# Altium PCB RT_SUPER_C.PCBdoc.ascii.PCBdoc (part 1 of 2)
Units mil, origin at the board's own origin, x right, y up, seen from the top; angles counter-clockwise.
Board outline 1450 x 1450 mil, 4 copper layers (Top Layer, GND, PWR, Bottom Layer), stack 39.556 mil thick; 167 components, 118 nets, 494 pads, 207 vias.
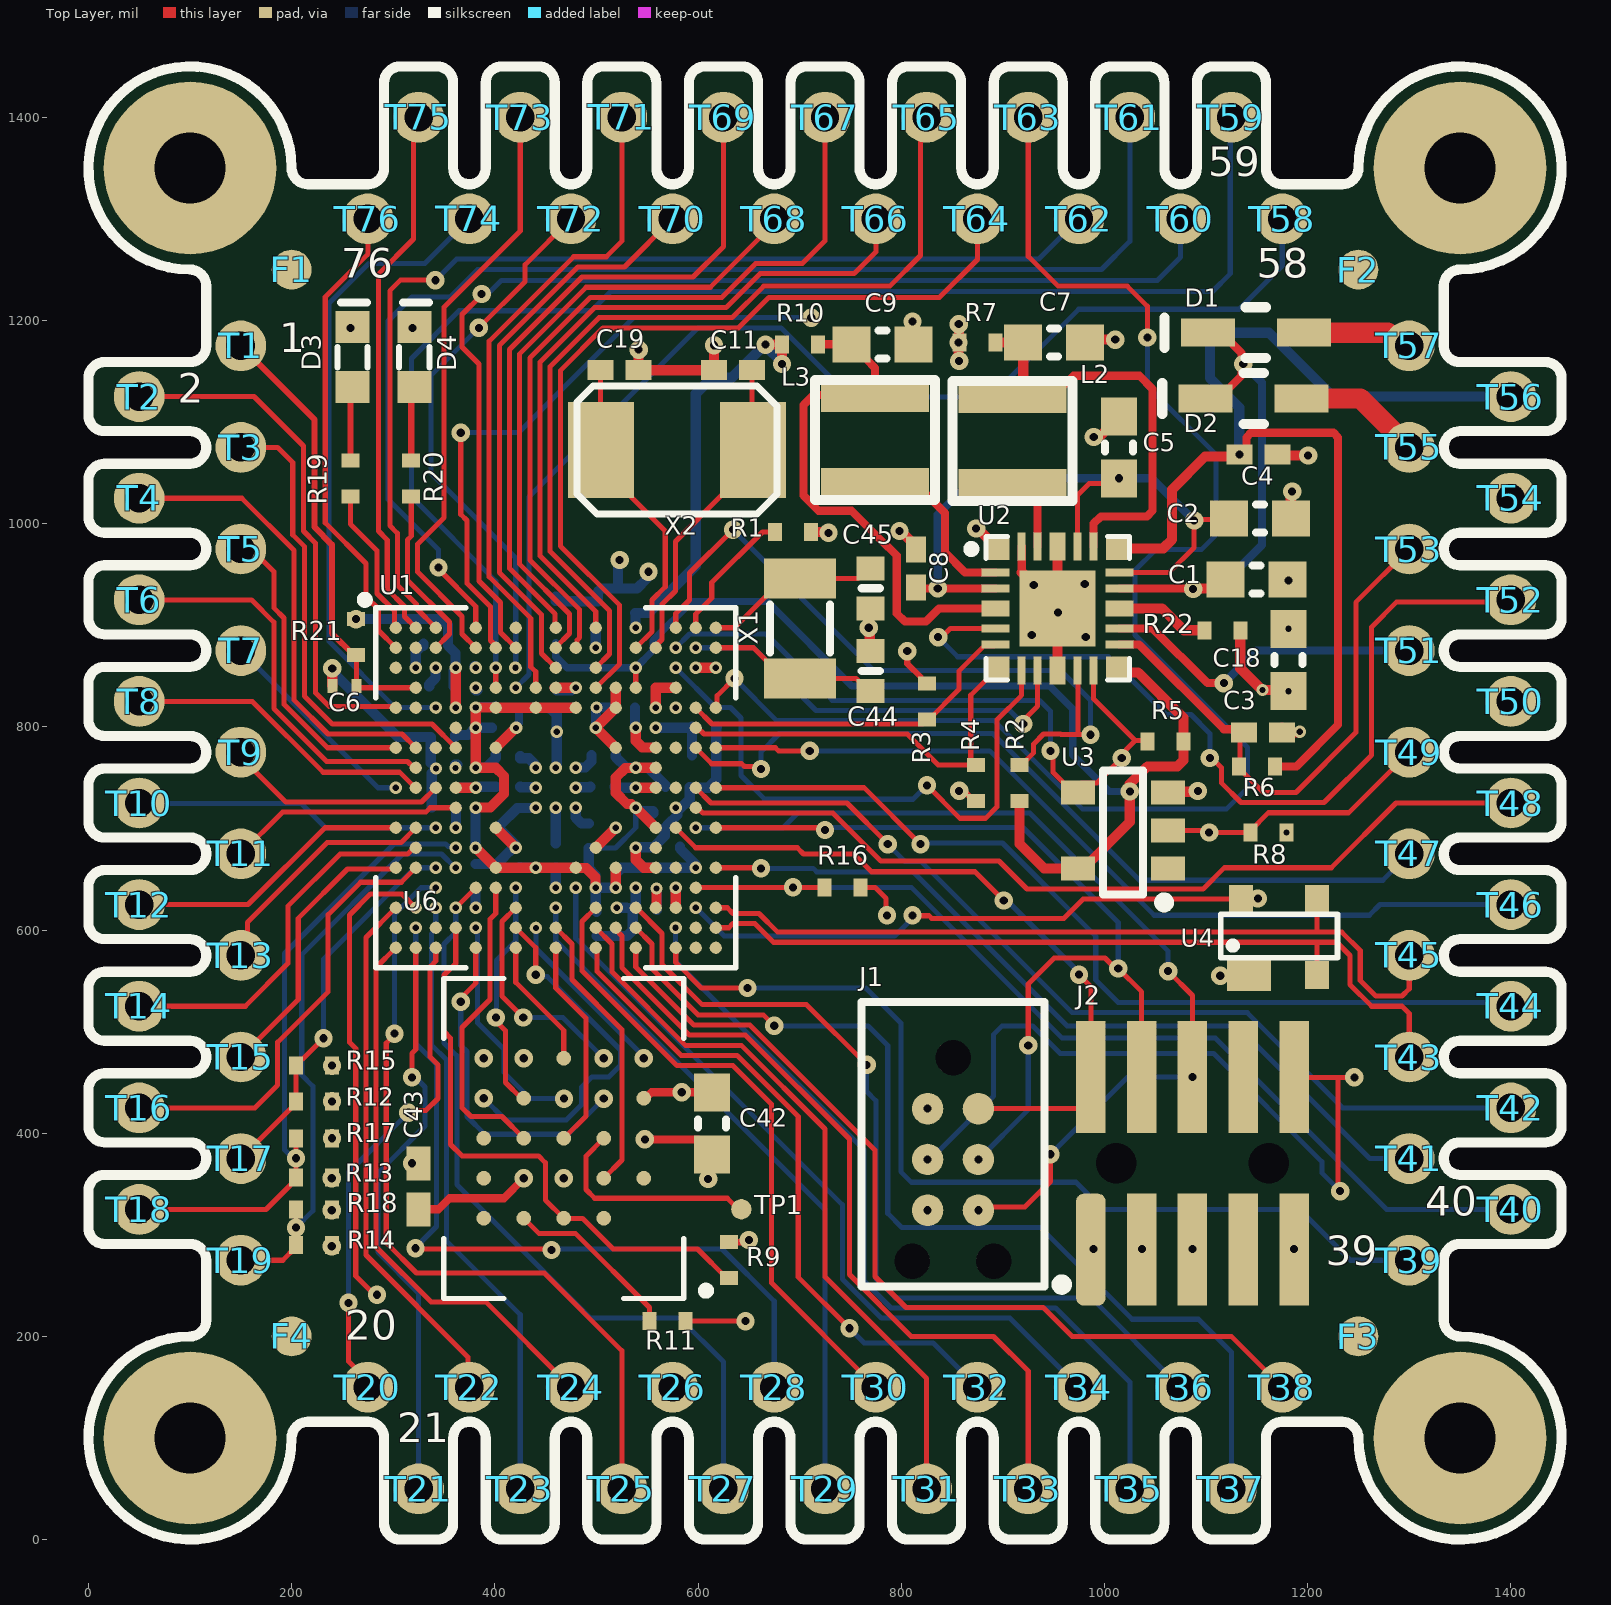
[diagram p0: Top Layer view]
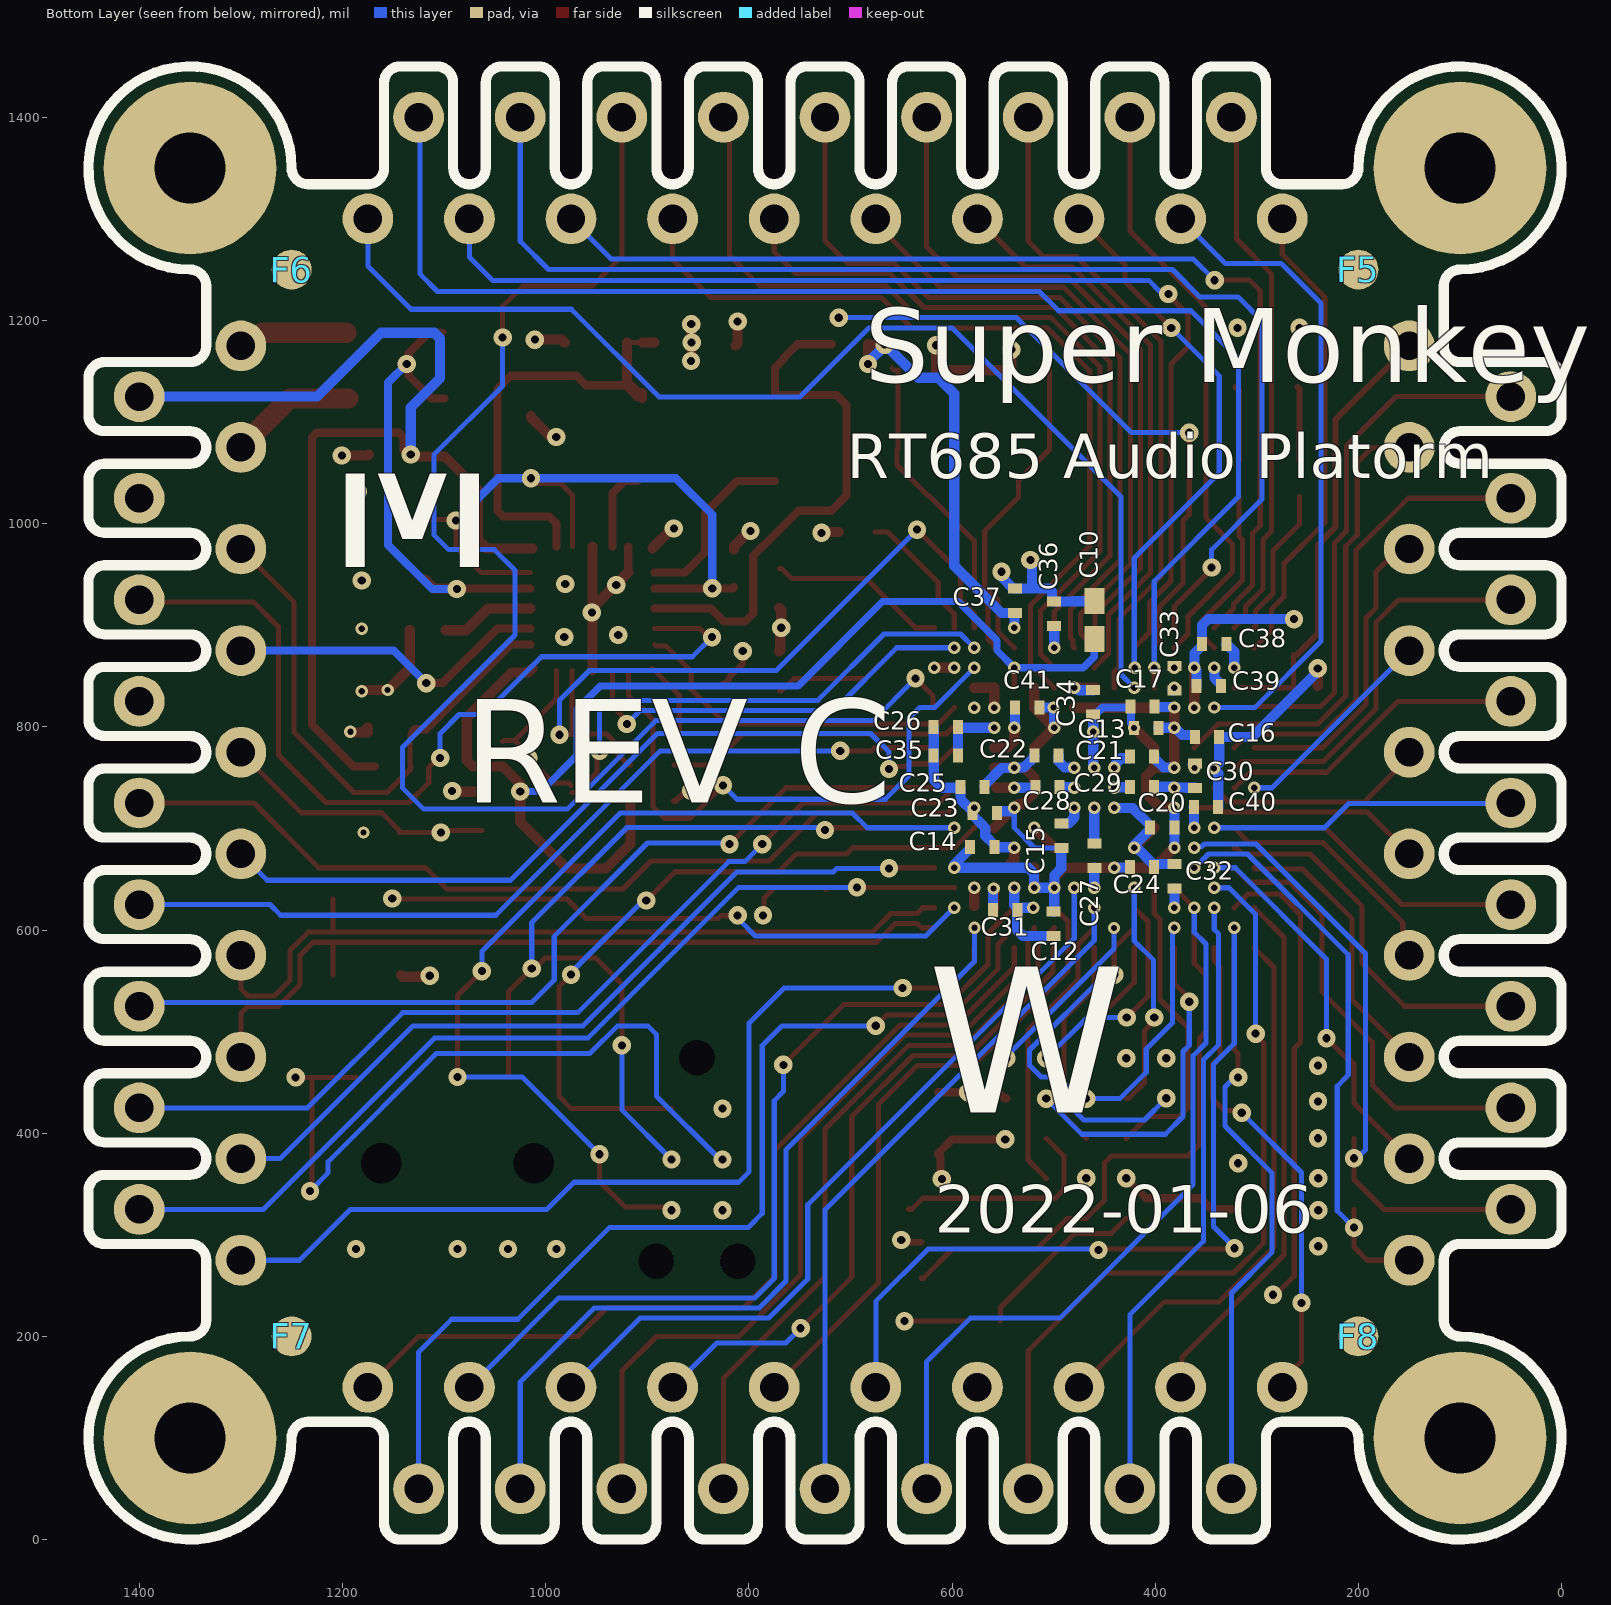
[diagram p1: Bottom Layer view, seen from below]
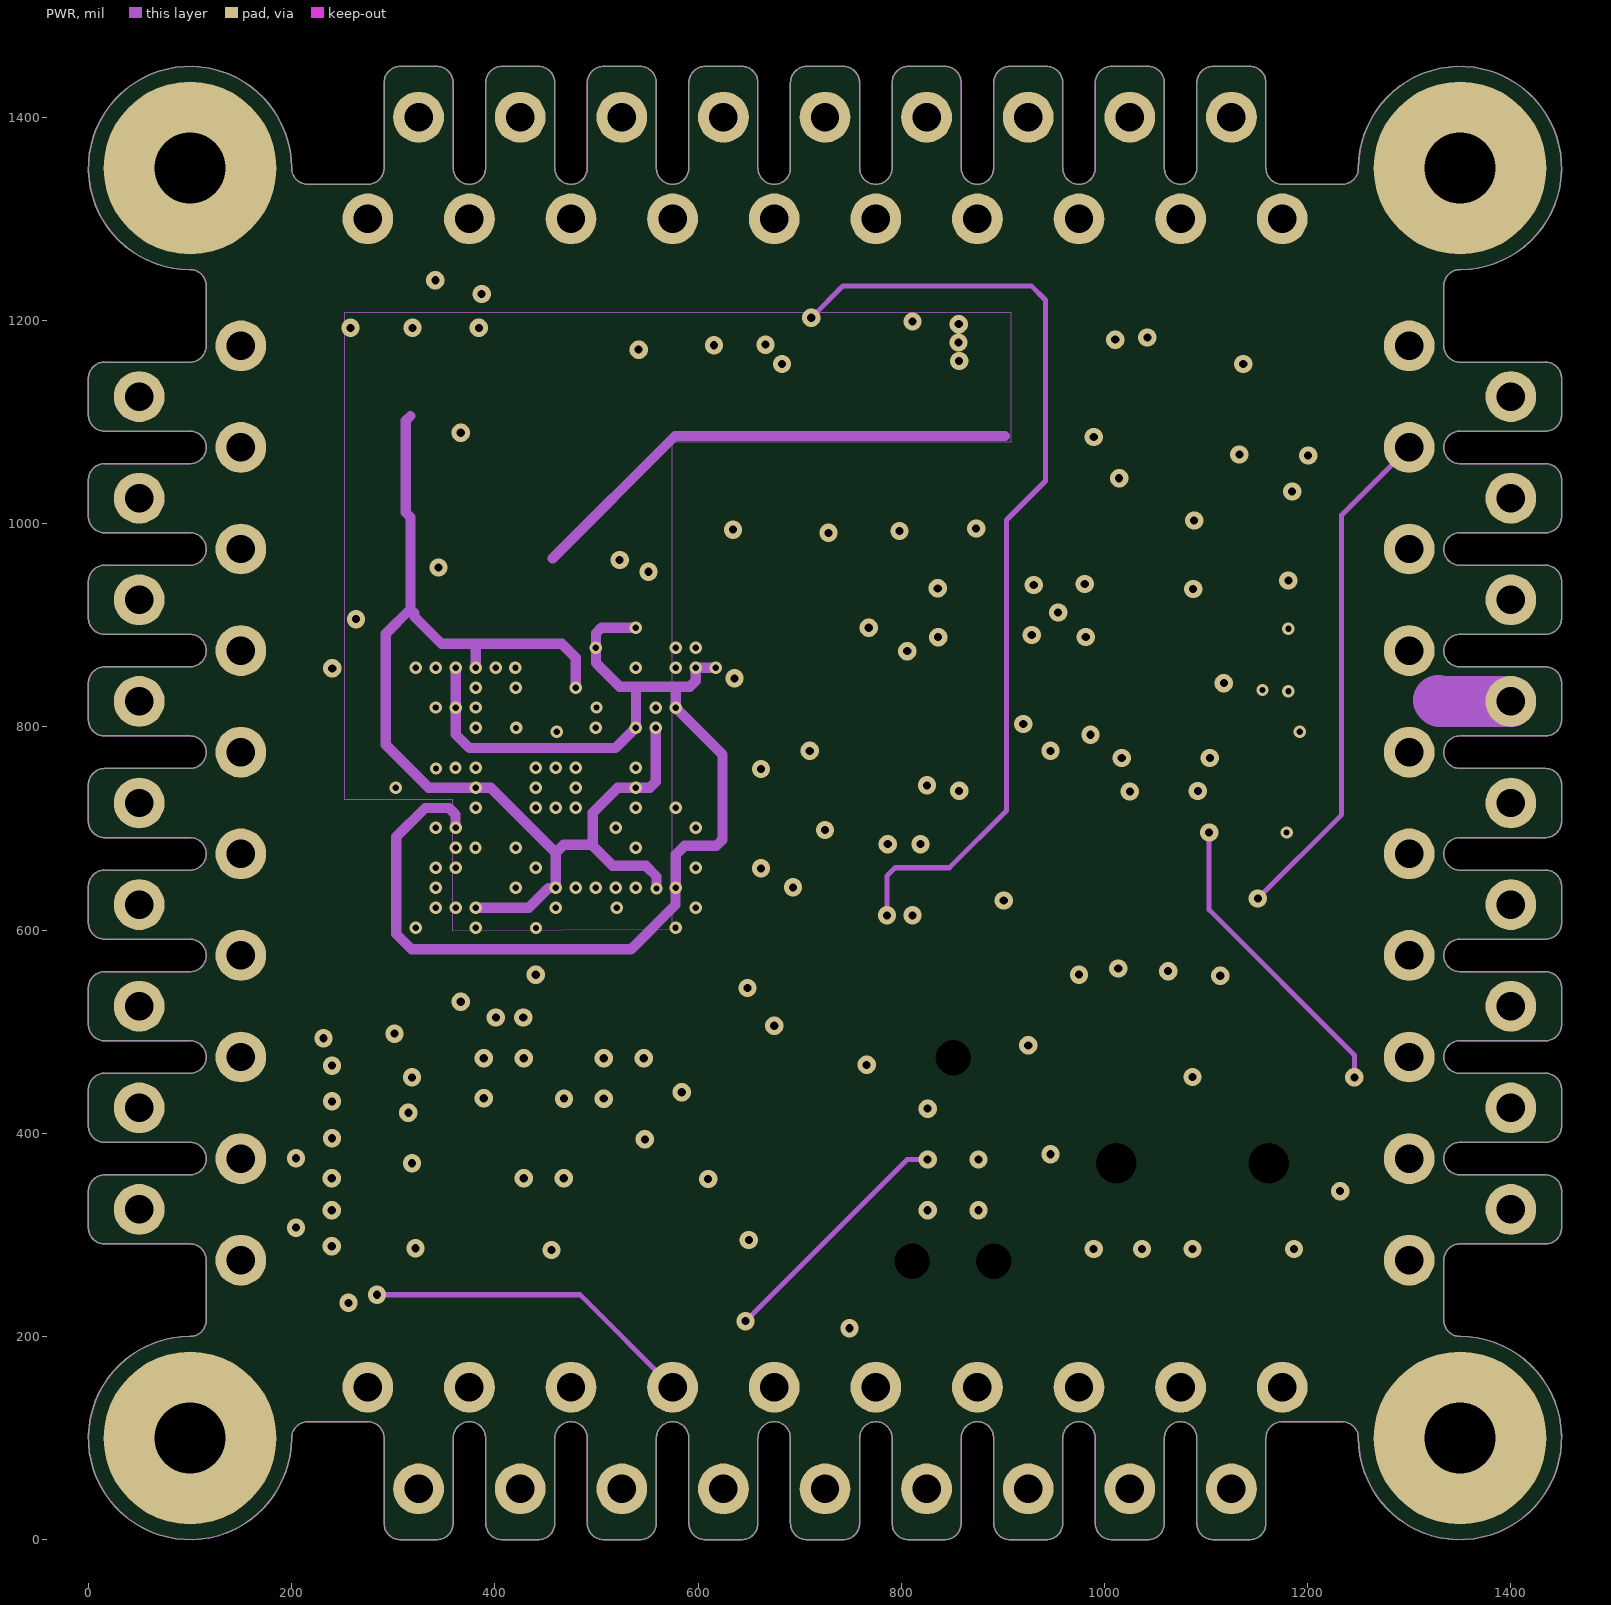
[diagram p2: PWR]

## Layer stack, top to bottom
Top Solder: solder mask 0.4, Solder Resist, Dk 3.5
Top Layer: signal copper 1.4
Dielectric 1: prepreg 2.8, PP-006, Dk 4.1
GND: signal copper 1.378
Dielectric1: dielectric 28.4, FR-4, Dk 4.8
PWR: signal copper 1.378
Dielectric 2: prepreg 2.8, PP-006, Dk 4.1
Bottom Layer: signal copper 1.4
Bottom Solder: solder mask 0.4, Solder Resist, Dk 3.5

## Board outline
0,307 0,343 cw(c16,343) 16,359 100,359 ccw(c100,375) 100,391 16,391 cw(c16,407) 0,407 0,443 cw(c16,443) 16,459 100,459 ccw(c100,475) 100,491 16,491 cw(c16,507) 0,507 0,543 cw(c16,543) 16,559 100,559 ccw(c100,575) 100,591 16,591 cw(c16,607) 0,607 0,643 cw(c16,643) 16,659 100,659 ccw(c100,675) 100,691 16,691 cw(c16,707) 0,707 0,743 cw(c16,743) 16,759 100,759 ccw(c100,775) 100,791 16,791 cw(c16,807) 0,807 0,843 cw(c16,843) 16,859 100,859 ccw(c100,875) 100,891 16,891 cw(c16,907) 0,907 0,943 cw(c16,943) 16,959 100,959 ccw(c100,975) 100,991 16,991 cw(c16,1007) 0,1007 0,1043 cw(c16,1043) 16,1059 100,1059 ccw(c100,1075) 100,1091 16,1091 cw(c16,1107) 0,1107 0,1143 cw(c16,1143) 16,1159 100,1159 ccw(c100,1175) 116,1175 116,1234 ccw(c100,1234) 100,1250 cw(c100,1350) 200,1350 ccw(c216,1350) 216,1334 275,1334 ccw(c275,1350) 291,1350 291,1434 cw(c307,1434) 307,1450 343,1450 cw(c343,1434) 359,1434 359,1350 ccw(c375,1350) 391,1350 391,1434 cw(c407,1434) 407,1450 443,1450 cw(c443,1434) 459,1434 459,1350 ccw(c475,1350) 491,1350 491,1434 cw(c507,1434) 507,1450 543,1450 cw(c543,1434) 559,1434 559,1350 ccw(c575,1350) 591,1350 591,1434 cw(c607,1434) 607,1450 643,1450 cw(c643,1434) 659,1434 659,1350 ccw(c675,1350) 691,1350 691,1434 cw(c707,1434) 707,1450 743,1450 cw(c743,1434) 759,1434 759,1350 ccw(c775,1350) 791,1350 791,1434 cw(c807,1434) 807,1450 843,1450 cw(c843,1434) 859,1434 859,1350 ccw(c875,1350) 891,1350 891,1434 cw(c907,1434) 907,1450 943,1450 cw(c943,1434) 959,1434 959,1350 ccw(c975,1350) 991,1350 991,1434 cw(c1007,1434) 1007,1450 1043,1450 cw(c1043,1434) 1059,1434 1059,1350 ccw(c1075,1350) 1091,1350 1091,1434 cw(c1107,1434) 1107,1450 1143,1450 cw(c1143,1434) 1159,1434 1159,1350 ccw(c1175,1350) 1175,1334 1234,1334 ccw(c1234,1350) 1250,1350 cw(c1350,1350) 1350,1250 ccw(c1350,1234) 1334,1234 1334,1175 ccw(c1350,1175) 1350,1159 1434,1159 cw(c1434,1143) 1450,1143 1450,1107 cw(c1434,1107) 1434,1091 1350,1091 ccw(c1350,1075) 1350,1059 1434,1059 cw(c1434,1043) 1450,1043 1450,1007 cw(c1434,1007) 1434,991 1350,991 ccw(c1350,975) 1350,959 1434,959 cw(c1434,943) 1450,943 1450,907 cw(c1434,907) 1434,891 1350,891 ccw(c1350,875) 1350,859 1434,859 cw(c1434,843) 1450,843 1450,807 cw(c1434,807) 1434,791 1350,791 ccw(c1350,775) 1350,759 1434,759 cw(c1434,743) 1450,743 1450,707 cw(c1434,707) 1434,691 1350,691 ccw(c1350,675) 1350,659 1434,659 cw(c1434,643) 1450,643 1450,607 cw(c1434,607) 1434,591 1350,591 ccw(c1350,575) 1350,559 1434,559 cw(c1434,543) 1450,543 1450,507 cw(c1434,507) 1434,491 1350,491 ccw(c1350,475) 1350,459 1434,459 cw(c1434,443) 1450,443 1450,407 cw(c1434,407) 1434,391 1350,391 ccw(c1350,375) 1350,359 1434,359 cw(c1434,343) 1450,343 1450,307 cw(c1434,307) 1434,291 1350,291 ccw(c1350,275) 1334,275 1334,216 ccw(c1350,216) 1350,200 cw(c1350,100) 1250,100 ccw(c1234,100) 1234,116 1175,116 ccw(c1175,100) 1159,100 1159,16 cw(c1143,16) 1143,0 1107,0 cw(c1107,16) 1091,16 1091,100 ccw(c1075,100) 1059,100 1059,16 cw(c1043,16) 1043,0 1007,0 cw(c1007,16) 991,16 991,100 ccw(c975,100) 959,100 959,16 cw(c943,16) 943,0 907,0 cw(c907,16) 891,16 891,100 ccw(c875,100) 859,100 859,16 cw(c843,16) 843,0 807,0 cw(c807,16) 791,16 791,100 ccw(c775,100) 759,100 759,16 cw(c743,16) 743,0 707,0 cw(c707,16) 691,16 691,100 ccw(c675,100) 659,100 659,16 cw(c643,16) 643,0 607,0 cw(c607,16) 591,16 591,100 ccw(c575,100) 559,100 559,16 cw(c543,16) 543,0 507,0 cw(c507,16) 491,16 491,100 ccw(c475,100) 459,100 459,16 cw(c443,16) 443,0 407,0 cw(c407,16) 391,16 391,100 ccw(c375,100) 359,100 359,16 cw(c343,16) 343,0 307,0 cw(c307,16) 291,16 291,100 ccw(c275,100) 275,116 216,116 ccw(c216,100) 200,100 cw(c100,100) 100,200 ccw(c100,216) 116,216 116,275 ccw(c100,275) 100,291 16,291 cw(c16,307)

## Design rules (kind name [scope] priority, off if disabled: settings)
AssemblyTestPointUsage [All] p0: scope1count=1 scope1_0_kind=Board scope1_0_value=Board scope2count=1 scope2_0_kind=Board scope2_0_value=Board commentlength=0
AssemblyTestpoint [All] p0: scope1count=1 scope1_0_kind=Board scope1_0_value=Board scope2count=1 scope2_0_kind=Board scope2_0_value=Board commentlength=0
Clearance [All] p0: scope1count=1 scope1_0_kind=Board scope1_0_value=Board scope2count=1 scope2_0_kind=Board scope2_0_value=Board commentlength=0 gap=5
Clearance [All] p1: gap=5 ignorepadtopadclearanceinfootprint=FALSE except(8: Arc-Poly Track-Poly SMDPad-Poly THPad-Poly Via-Poly Fill-Poly Poly-Poly)
ComponentClearance ComponentClearance_1 [All] p0: scope1count=1 scope1_0_kind=Footprint scope1_0_value=ER-TFT1.54-1 scope2count=1 scope2_0_kind=Board scope2_0_value=Board commentlength=0 gap=0 collisioncheckmode=3
ComponentClearance [All] p0: scope1count=1 scope1_0_kind=Board scope1_0_value=Board scope2count=1 scope2_0_kind=Board scope2_0_value=Board commentlength=0 gap=5 collisioncheckmode=3
ComponentClearance ComponentClearance_1 [HasFootprint('ER-TFT1.54-1')] p1: gap=0 collisioncheckmode=3 verticalgap=0 showdistances=FALSE
ComponentClearance [All] p2: gap=5 collisioncheckmode=3 verticalgap=5 showdistances=FALSE
DiffPairsRouting [All] p0: scope1count=1 scope1_0_kind=Board scope1_0_value=Board scope2count=1 scope2_0_kind=Board scope2_0_value=Board commentlength=0
FabricationTestPointUsage [All] p0: scope1count=1 scope1_0_kind=Board scope1_0_value=Board scope2count=1 scope2_0_kind=Board scope2_0_value=Board commentlength=0 valid=0 allowmultiple=FALSE
FabricationTestpoint [All] p0: scope1count=1 scope1_0_kind=Board scope1_0_value=Board scope2count=1 scope2_0_kind=Board scope2_0_value=Board commentlength=0 side=3 testpointundercomponent=TRUE minsize=40 maxsize=100 preferedsize=60 minholesize=0 maxholesize=40 preferedholesize=32 testpointgrid=1
FanoutControl Fanout_Default [All] p0: scope1count=1 scope1_0_kind=Board scope1_0_value=Board scope2count=1 scope2_0_kind=Board scope2_0_value=Board commentlength=30 // Fanout_Default (Default Rule)
FanoutControl Fanout_Small [All] p0 off: scope1count=1 scope1_0_kind=Board scope1_0_value=Board scope2count=1 scope2_0_kind=Board scope2_0_value=Board commentlength=84 // Protel DXP Scope 1 Expression Was: (CompPinCount < 5)   Fanout_Small (Default Rule)
FanoutControl Fanout_SOIC [All] p0 off: scope1count=1 scope1_0_kind=Board scope1_0_value=Board scope2count=1 scope2_0_kind=Board scope2_0_value=Board commentlength=71 // Protel DXP Scope 1 Expression Was: IsSOIC   Fanout_SOIC (Default Rule)
FanoutControl Fanout_LCC [All] p0 off: scope1count=1 scope1_0_kind=Board scope1_0_value=Board scope2count=1 scope2_0_kind=Board scope2_0_value=Board commentlength=69 // Protel DXP Scope 1 Expression Was: IsLCC   Fanout_LCC (Default Rule)
FanoutControl Fanout_BGA [All] p0 off: scope1count=1 scope1_0_kind=Board scope1_0_value=Board scope2count=1 scope2_0_kind=Board scope2_0_value=Board commentlength=69 // Protel DXP Scope 1 Expression Was: IsBGA   Fanout_BGA (Default Rule)
Height [All] p0: scope1count=1 scope1_0_kind=Board scope1_0_value=Board scope2count=1 scope2_0_kind=Board scope2_0_value=Board commentlength=0
HoleSize [All] p0: scope1count=1 scope1_0_kind=Board scope1_0_value=Board scope2count=1 scope2_0_kind=Board scope2_0_value=Board commentlength=0 absolutevalues=TRUE maxlimit=100 minlimit=1 maxpercent=80.000 minpercent=20.000
HoleToHoleClearance [All] p0: scope1count=1 scope1_0_kind=Board scope1_0_value=Board scope2count=1 scope2_0_kind=Board scope2_0_value=Board commentlength=0
LayerPairs [All] p0: scope1count=1 scope1_0_kind=Board scope1_0_value=Board scope2count=1 scope2_0_kind=Board scope2_0_value=Board commentlength=0 enforce=TRUE
MinimumSolderMaskSliver [All] p0: scope1count=1 scope1_0_kind=Board scope1_0_value=Board scope2count=1 scope2_0_kind=Board scope2_0_value=Board commentlength=0
NetAntennae [All] p0: scope1count=1 scope1_0_kind=Board scope1_0_value=Board scope2count=1 scope2_0_kind=Board scope2_0_value=Board commentlength=0
PasteMaskExpansion [All] p0: scope1count=1 scope1_0_kind=Board scope1_0_value=Board scope2count=1 scope2_0_kind=Board scope2_0_value=Board commentlength=0 expansion=0
PlaneClearance [All] p0: scope1count=1 scope1_0_kind=Board scope1_0_value=Board scope2count=1 scope2_0_kind=Board scope2_0_value=Board commentlength=0 clearance=10
PlaneClearance [All] p1: clearance=10
PlaneConnect [All] p0: scope1count=1 scope1_0_kind=Board scope1_0_value=Board scope2count=1 scope2_0_kind=Board scope2_0_value=Board commentlength=0 planeconnectstyle=Relief reliefexpansion=20 reliefentries=4 reliefconductorwidth=10 reliefairgap=10
PolygonConnect PolygonConnect_2 [All] p0: scope1count=1 scope1_0_kind=Net scope1_0_value=GND scope2count=1 scope2_0_kind=Board scope2_0_value=Board commentlength=0 connectstyle=Direct reliefconductorwidth=10 reliefentries=4 polygonreliefangle="90 Angle"
PolygonConnect PolygonConnect_1 [All] p0 off: scope1count=1 scope1_0_kind=Board scope1_0_value=Board scope2count=1 scope2_0_kind=Board scope2_0_value=Board commentlength=44 connectstyle=Direct reliefconductorwidth=10 reliefentries=4 polygonreliefangle="90 Angle" // Protel DXP Scope 1 Expression Was: IsVia
PolygonConnect [All] p0: scope1count=1 scope1_0_kind=Board scope1_0_value=Board scope2count=1 scope2_0_kind=Board scope2_0_value=Board commentlength=0 connectstyle=Relief reliefconductorwidth=10 reliefentries=4 polygonreliefangle="90 Angle"
PolygonConnect PolygonConnect_2 [InNet('GND')] p1: thpad.connectstyle=Direct thpad.reliefconductorwidth=10 thpad.reliefentries=4 thpad.polygonreliefangle="90 Angle" thpad.airgapwidth=10 smdpad.connectstyle=Relief smdpad.reliefconductorwidth=10 smdpad.reliefentries=4 smdpad.polygonreliefangle="90 Angle" smdpad.airgapwidth=10 via.connectstyle=Direct via.reliefconductorwidth=10 via.reliefentries=4 via.polygonreliefangle="90 Angle" via.airgapwidth=10
PolygonConnect PolygonConnect_1 [IsVia] p2: connectstyle=Direct reliefconductorwidth=10 reliefentries=4 polygonreliefangle="90 Angle" airgapwidth=10
PolygonConnect [All] p3: connectstyle=Relief reliefconductorwidth=10 reliefentries=4 polygonreliefangle="90 Angle" airgapwidth=5
RoutingCorners [All] p0: scope1count=1 scope1_0_kind=Board scope1_0_value=Board scope2count=1 scope2_0_kind=Board scope2_0_value=Board commentlength=0 cornerstyle=45-Degree minsetback=100 maxsetback=100
RoutingLayers [All] p0: scope1count=1 scope1_0_kind=Board scope1_0_value=Board scope2count=1 scope2_0_kind=Board scope2_0_value=Board commentlength=0 top layer=Automatic mid layer 1=Automatic mid layer 2=Automatic bottom layer=Automatic
RoutingPriority [All] p0: scope1count=1 scope1_0_kind=Board scope1_0_value=Board scope2count=1 scope2_0_kind=Board scope2_0_value=Board commentlength=0
RoutingTopology [All] p0: scope1count=1 scope1_0_kind=Board scope1_0_value=Board scope2count=1 scope2_0_kind=Board scope2_0_value=Board commentlength=0 topology=Shortest
RoutingVias [All] p0: scope1count=1 scope1_0_kind=Board scope1_0_value=Board scope2count=1 scope2_0_kind=Board scope2_0_value=Board commentlength=0 holewidth=12 width=26 viastyle="Through Hole" minholewidth=6 minwidth=6 maxholewidth=50 maxwidth=75
RoutingVias [All] p1: holewidth=12 width=26 viastyle="Through Hole" minholewidth=6 minwidth=6 maxholewidth=50 maxwidth=75
ShortCircuit [All] p0: scope1count=1 scope1_0_kind=Board scope1_0_value=Board scope2count=1 scope2_0_kind=Board scope2_0_value=Board commentlength=0 allowed=FALSE
SilkToBoardRegionClearance [All] p0: scope1count=1 scope1_0_kind=Board scope1_0_value=Board scope2count=1 scope2_0_kind=Board scope2_0_value=Board commentlength=0
SilkToSilkClearance [All] p0: scope1count=1 scope1_0_kind=Board scope1_0_value=Board scope2count=1 scope2_0_kind=Board scope2_0_value=Board commentlength=0
SilkToSolderMaskClearance SilkscreenOverComponentPads [All] p0 off: scope1count=1 scope1_0_kind=Board scope1_0_value=Board scope2count=1 scope2_0_kind=Board scope2_0_value=Board commentlength=44 // Protel DXP Scope 1 Expression Was: IsPad
SilkToSolderMaskClearance SilkscreenOverComponentPads [IsPad] p1: minsilkscreentomaskgap=10 clearancetoexposedcopper=TRUE
SolderMaskExpansion [All] p0: scope1count=1 scope1_0_kind=Board scope1_0_value=Board scope2count=1 scope2_0_kind=Board scope2_0_value=Board commentlength=0 expansion=4
SolderMaskExpansion [All] p1: expansion=4 istentingtop=FALSE
UnRoutedNet [All] p0: scope1count=1 scope1_0_kind=Board scope1_0_value=Board scope2count=1 scope2_0_kind=Board scope2_0_value=Board commentlength=0
UnpouredPolygon [All] p0: scope1count=1 scope1_0_kind=Board scope1_0_value=Board scope2count=1 scope2_0_kind=Board scope2_0_value=Board commentlength=0
Width [All] p0: scope1count=1 scope1_0_kind=Board scope1_0_value=Board scope2count=1 scope2_0_kind=Board scope2_0_value=Board commentlength=0 maxlimit=200 minlimit=5 preferedwidth=5
Width [All] p1: maxlimit=200 minlimit=5 preferedwidth=5
27 further rules are at their usual default settings.

## Components (designator, comment, footprint, x,y, rotation, side; value= is the part's Value field where it differs from the comment)
C1 "2.2µF" C0603_0.90MM_MD 1149.48,945.11 r180 top
C2 "4.7µF" C0603_1.00MM_MD 1152.89,1005.11 r0 top
C3 "0.47µF" C0402_0.55MM_HD 1156.22,794.35 r180 top
C4 "1µF" C0402_0.55MM_HD 1151.48,1068.11 r180 top
C5 "2.2µF" C0603_0.90MM_MD 1014.48,1075.11 r90 top
C6 "0.1uF 6v" C0201_PERFECT 252.04,840.39 r0 top
C7 "10µF" C0603_0.90MM_MD 950.58,1178.11 r180 top
C8 "1µF" C0402_0.55MM_HD 814.47,956.06 r90 top
C9 "10µF" C0603_0.90MM_MD 781.53,1176.53 r180 top
C10 "1µF" C0402_0.55MM_HD 460,905.35 r270 bottom
C11 "18pF" C0402_0.55MM_HD 634.37,1151.02 r0 top
C12 "0.1uF 6v" C0201_PERFECT 500,606 r90 bottom
C13 "0.1uF 6v" C0201_PERFECT 409,799 r180 bottom
C14 "0.1uF 6v" C0201_PERFECT 570.24,681.93 r0 bottom
C15 "0.1uF 6v" C0201_PERFECT 492.48,692.76 r270 bottom
C16 "0.1uF 6v" C0201_PERFECT 349,790 r0 bottom
C17 "0.1uF 6v" C0201_PERFECT 412.49,820.12 r180 bottom
C18 "2.2µF" C0603_0.90MM_MD 1181,865.53 r270 top
C19 "18pF" C0402_0.55MM_HD 522.87,1151.02 r180 top
C20 "0.1uF 6v" C0201_PERFECT 393,701 r180 bottom
C21 "0.1uF 6v" C0201_PERFECT 413,771 r180 bottom
C22 "0.1uF 6v" C0201_PERFECT 507,772 r0 bottom
C23 "0.1uF 6v" C0201_PERFECT 567.88,715 r180 bottom
C24 "0.1uF 6v" C0201_PERFECT 413,662 r0 bottom
C25 "0.1uF 6v" C0201_PERFECT 579.88,741 r180 bottom
C26 "0.1uF 6v" C0201_PERFECT 606,800 r180 bottom
C27 "0.1uF 6v" C0201_PERFECT 460,673.26 r270 bottom
C28 "0.1uF 6v" C0201_PERFECT 506,741 r0 bottom
C29 "0.1uF 6v" C0201_PERFECT 413,741 r180 bottom
C30 "0.1uF 6v" C0201_PERFECT 361.08,752 r270 bottom
C31 "0.1uF 6v" C0201_PERFECT 547.6,619.92 r0 bottom
C32 "0.1uF 6v" C0201_PERFECT 381,653 r270 bottom
C33 "0.1uF 6v" C0201_PERFECT 380.99,847.71 r90 bottom
C34 "0.1uF 6v" C0201_PERFECT 461,824 r90 bottom
C35 "0.1uF 6v" C0201_PERFECT 606,772 r180 bottom
C36 "0.1uF 6v" C0201_PERFECT 499.57,911.18 r270 bottom
C37 "0.1uF 6v" C0201_PERFECT 538,924.06 r270 bottom
C38 "0.1uF 6v" C0201_PERFECT 341.89,881.73 r0 bottom
C39 "0.1uF 6v" C0201_PERFECT 347.41,840 r0 bottom
C40 "0.1uF 6v" C0201_PERFECT 350,721.16 r0 bottom
C41 "0.1uF 6v" C0201_PERFECT 526,819 r0 bottom
C42 "4.7µF" C0603_1.00MM_MD 613.54,409.78 r270 top
C43 "0.1µF" C0402_0.55MM_MD 325,347.78 r90 top
C44 "9.5pF" PERFECT_0402 770,854.77 r90 top
C45 "9.5pF" PERFECT_0402 770,936.33 r270 top
D1 "BAT760-7" D_SOD-323_P 1149,1188 r180 top
D2 "BAT760-7" D_SOD-323_P 1146.88,1123.21 r180 top
D3 "LED 1.6X0.8MM 570NM GRN CLR SMD" "LED_0603 - GREEN" 259.93,1163.82 r90 top
D4 "LED 1.6X0.8MM 630NM RED CLR SMD" "LED_0603 - RED" 320.87,1163.82 r90 top
F1 "PCB Fiducial" "Fiducial 1mm - 2mm" 200,1250 r180 top
F2 "PCB Fiducial" "Fiducial 1mm - 2mm" 1250,1250 r180 top
F3 "PCB Fiducial" "Fiducial 1mm - 2mm" 1250,200 r180 top locked
F4 "PCB Fiducial" "Fiducial 1mm - 2mm" 200,200 r180 top locked
F5 "PCB Fiducial" "Fiducial 1mm - 2mm" 200,1250 r0 bottom
F6 "PCB Fiducial" "Fiducial 1mm - 2mm" 1250,1250 r0 bottom
F7 "PCB Fiducial" "Fiducial 1mm - 2mm" 1250,200 r0 bottom
F8 "PCB Fiducial" "Fiducial 1mm - 2mm" 200,200 r0 bottom
J1 "TC2030‐CTL‐NL" "TC2030 NO LATCH" 851,374.15 r270 top locked
J2 "FTSH-105-01-F-DV" FTSH-105-01-F-DV-K-A 1086.67,370.42 r0 top
L2 "2.2µH 1.5A" L_NRH3012 909.48,1081.17 r90 top
L3 "2.2µH 1.5A" L_NRH3012 774.2,1082.17 r90 top
R1 "10k" R0402_0.40MM_HD 693.51,991.78 r180 top
R2 "20k" R0402_0.40MM_HD 916.38,744.73 r270 top
R3 "2.2k" R0402_0.40MM_HD 825.31,825 r90 top
R4 "2.2k" R0402_0.40MM_HD 873.74,744.73 r270 top
R5 "20k" R0402_0.40MM_HD 1059.96,785.41 r0 top
R6 "0" R0402_0.40MM_HD 1150.32,761.01 r0 top
R7 "0" R0402_0.40MM_HD 875,1178.11 r180 top
R8 "100k" R0402_0.40MM_HD 1161.67,696.05 r0 top
R9 "100k" R0402_0.40MM_HD 630.28,275 r90 top
R10 "0" R0402_0.40MM_HD 700.34,1176.53 r180 top
R11 "0" R0402_0.40MM_HD 570,215 r180 top
R12 "100k" R0402_0.40MM_HD 222,431.39 r0 top
R13 "100k" R0402_0.40MM_HD 222,356.48 r0 top
R14 "100k" R0402_0.40MM_HD 222,290 r0 top
R15 "100k" R0402_0.40MM_HD 222,466.5 r180 top
R16 "1k" R0402_0.40MM_HD 742,642 r180 top
R17 "100k" R0402_0.40MM_HD 222,395 r180 top
R18 "100k" R0402_0.40MM_HD 222,325 r180 top
R19 "1k" R0402_0.40MM_HD 258,1044.28 r270 top
R20 "1k" R0402_0.40MM_HD 317.73,1044.6 r270 top
R21 "0" R0402_0.40MM_HD 263.36,888.26 r270 top
R22 "0" R0402_0.40MM_HD 1116,895 r0 top
T1 "SOLDER_HOLE" MACHINE_PIN_SOLDERHOLE 150,1175 r180 top locked
T2 "SOLDER_HOLE" MACHINE_PIN_SOLDERHOLE 50,1125 r180 top locked
T3 "SOLDER_HOLE" MACHINE_PIN_SOLDERHOLE 150,1075 r180 top locked
T4 "SOLDER_HOLE" MACHINE_PIN_SOLDERHOLE 50,1025 r180 top locked
T5 "SOLDER_HOLE" MACHINE_PIN_SOLDERHOLE 150,975 r180 top
T6 "SOLDER_HOLE" MACHINE_PIN_SOLDERHOLE 50,925 r180 top locked
T7 "SOLDER_HOLE" MACHINE_PIN_SOLDERHOLE 150,875 r180 top locked
T8 "SOLDER_HOLE" MACHINE_PIN_SOLDERHOLE 50,825 r180 top locked
T9 "SOLDER_HOLE" MACHINE_PIN_SOLDERHOLE 150,775 r180 top locked
T10 "SOLDER_HOLE" MACHINE_PIN_SOLDERHOLE 50,725 r180 top locked
T11 "SOLDER_HOLE" MACHINE_PIN_SOLDERHOLE 150,675 r180 top locked
T12 "SOLDER_HOLE" MACHINE_PIN_SOLDERHOLE 50,625 r180 top locked
T13 "SOLDER_HOLE" MACHINE_PIN_SOLDERHOLE 150,575 r180 top locked
T14 "SOLDER_HOLE" MACHINE_PIN_SOLDERHOLE 50,525 r180 top locked
T15 "SOLDER_HOLE" MACHINE_PIN_SOLDERHOLE 150,475 r180 top locked
T16 "SOLDER_HOLE" MACHINE_PIN_SOLDERHOLE 50,425 r180 top locked
T17 "SOLDER_HOLE" MACHINE_PIN_SOLDERHOLE 150,375 r180 top locked
T18 "SOLDER_HOLE" MACHINE_PIN_SOLDERHOLE 50,325 r180 top locked
T19 "SOLDER_HOLE" MACHINE_PIN_SOLDERHOLE 150,275 r180 top locked
T20 "SOLDER_HOLE" MACHINE_PIN_SOLDERHOLE 275,150 r180 top locked
T21 "SOLDER_HOLE" MACHINE_PIN_SOLDERHOLE 325,50 r180 top locked
T22 "SOLDER_HOLE" MACHINE_PIN_SOLDERHOLE 375,150 r180 top locked
T23 "SOLDER_HOLE" MACHINE_PIN_SOLDERHOLE 425,50 r180 top locked
T24 "SOLDER_HOLE" MACHINE_PIN_SOLDERHOLE 475,150 r180 top locked
T25 "SOLDER_HOLE" MACHINE_PIN_SOLDERHOLE 525,50 r180 top locked
T26 "SOLDER_HOLE" MACHINE_PIN_SOLDERHOLE 575,150 r180 top locked
T27 "SOLDER_HOLE" MACHINE_PIN_SOLDERHOLE 625,50 r180 top locked
T28 "SOLDER_HOLE" MACHINE_PIN_SOLDERHOLE 675,150 r180 top locked
T29 "SOLDER_HOLE" MACHINE_PIN_SOLDERHOLE 725,50 r180 top locked
T30 "SOLDER_HOLE" MACHINE_PIN_SOLDERHOLE 775,150 r180 top locked
T31 "SOLDER_HOLE" MACHINE_PIN_SOLDERHOLE 825,50 r180 top locked
T32 "SOLDER_HOLE" MACHINE_PIN_SOLDERHOLE 875,150 r180 top locked
T33 "SOLDER_HOLE" MACHINE_PIN_SOLDERHOLE 925,50 r180 top locked
T34 "SOLDER_HOLE" MACHINE_PIN_SOLDERHOLE 975,150 r180 top locked
T35 "SOLDER_HOLE" MACHINE_PIN_SOLDERHOLE 1025,50 r180 top locked
T36 "SOLDER_HOLE" MACHINE_PIN_SOLDERHOLE 1075,150 r180 top locked
T37 "SOLDER_HOLE" MACHINE_PIN_SOLDERHOLE 1125,50 r180 top locked
T38 "SOLDER_HOLE" MACHINE_PIN_SOLDERHOLE 1175,150 r180 top locked
T39 "SOLDER_HOLE" MACHINE_PIN_SOLDERHOLE 1300,275 r180 top locked
T40 "SOLDER_HOLE" MACHINE_PIN_SOLDERHOLE 1400,325 r180 top locked
T41 "SOLDER_HOLE" MACHINE_PIN_SOLDERHOLE 1300,375 r180 top locked
T42 "SOLDER_HOLE" MACHINE_PIN_SOLDERHOLE 1400,425 r180 top locked
T43 "SOLDER_HOLE" MACHINE_PIN_SOLDERHOLE 1300,475 r180 top locked
T44 "SOLDER_HOLE" MACHINE_PIN_SOLDERHOLE 1400,525 r180 top locked
T45 "SOLDER_HOLE" MACHINE_PIN_SOLDERHOLE 1300,575 r180 top locked
T46 "SOLDER_HOLE" MACHINE_PIN_SOLDERHOLE 1400,625 r180 top locked
T47 "SOLDER_HOLE" MACHINE_PIN_SOLDERHOLE 1300,675 r180 top locked
T48 "SOLDER_HOLE" MACHINE_PIN_SOLDERHOLE 1400,725 r180 top locked
T49 "SOLDER_HOLE" MACHINE_PIN_SOLDERHOLE 1300,775 r180 top locked
T50 "SOLDER_HOLE" MACHINE_PIN_SOLDERHOLE 1400,825 r180 top locked
T51 "SOLDER_HOLE" MACHINE_PIN_SOLDERHOLE 1300,875 r180 top locked
T52 "SOLDER_HOLE" MACHINE_PIN_SOLDERHOLE 1400,925 r180 top locked
T53 "SOLDER_HOLE" MACHINE_PIN_SOLDERHOLE 1300,975 r180 top locked
T54 "SOLDER_HOLE" MACHINE_PIN_SOLDERHOLE 1400,1025 r180 top locked
T55 "SOLDER_HOLE" MACHINE_PIN_SOLDERHOLE 1300,1075 r180 top locked
T56 "SOLDER_HOLE" MACHINE_PIN_SOLDERHOLE 1400,1125 r180 top locked
T57 "SOLDER_HOLE" MACHINE_PIN_SOLDERHOLE 1300,1175 r180 top locked
T58 "SOLDER_HOLE" MACHINE_PIN_SOLDERHOLE 1175,1300 r180 top locked
T59 "SOLDER_HOLE" MACHINE_PIN_SOLDERHOLE 1125,1400 r180 top locked
T60 "SOLDER_HOLE" MACHINE_PIN_SOLDERHOLE 1075,1300 r180 top locked
T61 "SOLDER_HOLE" MACHINE_PIN_SOLDERHOLE 1025,1400 r180 top locked
T62 "SOLDER_HOLE" MACHINE_PIN_SOLDERHOLE 975,1300 r180 top locked
T63 "SOLDER_HOLE" MACHINE_PIN_SOLDERHOLE 925,1400 r180 top locked
T64 "SOLDER_HOLE" MACHINE_PIN_SOLDERHOLE 875,1300 r180 top locked
T65 "SOLDER_HOLE" MACHINE_PIN_SOLDERHOLE 825,1400 r180 top locked
T66 "SOLDER_HOLE" MACHINE_PIN_SOLDERHOLE 775,1300 r180 top locked
T67 "SOLDER_HOLE" MACHINE_PIN_SOLDERHOLE 725,1400 r180 top locked
T68 "SOLDER_HOLE" MACHINE_PIN_SOLDERHOLE 675,1300 r180 top locked
T69 "SOLDER_HOLE" MACHINE_PIN_SOLDERHOLE 625,1400 r180 top locked
T70 "SOLDER_HOLE" MACHINE_PIN_SOLDERHOLE 575,1300 r180 top locked
T71 "SOLDER_HOLE" MACHINE_PIN_SOLDERHOLE 525,1400 r180 top locked
T72 "SOLDER_HOLE" MACHINE_PIN_SOLDERHOLE 475,1300 r180 top locked
T73 "SOLDER_HOLE" MACHINE_PIN_SOLDERHOLE 425,1400 r180 top locked
T74 "SOLDER_HOLE" MACHINE_PIN_SOLDERHOLE 375,1300 r180 top locked
T75 "SOLDER_HOLE" MACHINE_PIN_SOLDERHOLE 325,1400 r180 top locked
T76 "SOLDER_HOLE" MACHINE_PIN_SOLDERHOLE 275,1300 r180 top locked
TP1 "SMT_TEST" "SMT_TP - 20" 642.65,325.15 r180 top
U1 "MIMXRT685SFVKB" VFBGA176 460,740 r0 top locked
U2 "PCA9420BSAZ" PCA9420 953.98,916.61 r0 top
U3 "SN74AUC1G07DBVR" SOT23-5 1018.43,698.02 r180 top
U4 "PRTR5V0U2X,215" SOT143B 1142.37,555.63 r0 top
U6 "APS6408L-3OBM-BA" BGA24C100P5X5_600X800X120 467.87,395 r180 top
X1 "32.768kHz" XTAL_3215 700.34,896.93 r270 top
X2 "24MHz" ABM3 579.27,1072.54 r0 top

## Footprints (in the part's own frame and the unit in brackets; to place one, negate y for a bottom-side part, rotate by r counter-clockwise, add the part's x,y. Pads: shape width x height; smd on the part's side, far side on the other; paste and mask are expansions set on the pad)
ABM3 [mm] "Abracon Crystal 5x3.2mm"
  rect 1.651x2.4 smd: 1(-1.9,0) 2(1.9,0)
  silkscreen extent -2.5,-1.6 2.5,1.6
BGA24C100P5X5_600X800X120 [mm]
  round 0.37 smd: A2(-1,2) A3(0,2) A4(1,2) A5(2,2) B1(-2,1) B2(-1,1) B3(0,1) B4(1,1) B5(2,1) C1(-2,0) C2(-1,0) C3(0,0) C4(1,0) C5(2,0) D1(-2,-1) D2(-1,-1) D3(0,-1) D4(1,-1) D5(2,-1) E1(-2,-2) E2(-1,-2) E3(0,-2) E4(1,-2) E5(2,-2)
  silkscreen extent -3.66,-4 3,4
C0201_PERFECT [mm] "Chip Capacitor, 2-Leads, Body 0.60x0.35mm, IPC High https://www.worthingtonassembly.com/blog/2018/1/29/the-perfect-0201-footprint"
  rect 0.25x0.35 smd mask+0: 1(-0.305,0) 2(0.305,0)
C0402_0.55MM_HD [mm] "Capacitor 0402 0.55mm Height- High Density"
  rect 0.65x0.5 smd: 1(-0.475,0) 2(0.475,0)
C0402_0.55MM_MD [mm] "Capacitor - 0402 - Medium Density"
  rect 0.85x0.6 smd: 1(-0.575,0) 2(0.575,0)
C0603_0.90MM_MD [mm] "Capacitor 0603 - Medium Density"
  rect 0.95x0.9 smd: 1(-0.775,0) 2(0.775,0)
  silkscreen extent -0.1,-0.35 0.1,0.35
C0603_1.00MM_MD [mm] "Capacitor 0603 - Medium Density"
  rect 0.95x0.9 smd: 1(-0.775,0) 2(0.775,0)
  silkscreen extent -0.1,-0.35 0.1,0.35
D_SOD-323_P [mm] "SOD-123 Diode - Polarized"
  rect 1.35x0.7 smd: 1(-1.2,0) 2(1.2,0)
  silkscreen extent -0.25,-0.64 2.29,0.64
"Fiducial 1mm - 2mm" [mm] "1mm Pad 2mm Opening"
  round 1 smd paste-10 mask+0: 1(0,0)
FTSH-105-01-F-DV-K-A [mil] "Samtec FTSH-105-01-F-DV-K-A SMT Connector"
  rrect50% 29x110 smd: 1(-100,-85)
  rect 29x110 smd: 2(-100,85) 3(-50,-85) 4(-50,85) 5(0,-85) 6(0,85) 7(50,-85) 8(50,85) 9(100,-85) 10(100,85)
  round 5 hole 40 unplated mask+0: A(-75,0) A_1(75,0)
  silkscreen extent -134,-124 -124,-114
L_NRH3012 [mm] "Inductor"
  rect 0.8x2.7 smd: 1(-1.1,0) 2(1.1,0)
  silkscreen extent -1.5,-1.5 1.5,1.5
"LED_0603 - GREEN" [mm] "LED_0603 - GREEN"
  rect 0.8x0.85 smd: A(-0.75,0) C(0.75,0)
  silkscreen extent -0.25,-0.38 1.37,0.38
"LED_0603 - RED" [mm] "LED_0603"
  rect 0.8x0.85 smd: A(-0.75,0) C(0.75,0)
  silkscreen extent -0.25,-0.38 1.37,0.38
MACHINE_PIN_SOLDERHOLE [mil]
  round 50 hole 28: 1(0,0)
PCA9420 [mm]
  rect 0.7x0.2 smd mask+0: 1(-1.55,0.9) 2(-1.55,0.5) 4(-1.55,-0.5) 5(-1.55,-0.9) 13(1.55,-0.9) 14(1.55,-0.5) 16(1.55,0.5) 17(1.55,0.9)
  rect 0.7x0.4 smd mask+0: 3(-1.55,0) 15(1.55,0)
  rect 0.584x0.584 smd mask+0: 6(-1.5,-1.5) 12(1.5,-1.5) 18(1.5,1.5) 24(-1.5,1.5)
  rect 0.2x0.7 smd mask+0: 7(-0.9,-1.55) 8(-0.5,-1.55) 10(0.5,-1.55) 11(0.9,-1.55) 19(0.9,1.55) 20(0.5,1.55) 22(-0.5,1.55) 23(-0.9,1.55)
  rect 0.4x0.7 smd mask+0: 9(0,-1.55) 21(0,1.55)
  rect 1.9x1.9 smd mask+0: 25(0,0)
  silkscreen extent -2.26,-1.8 1.8,1.8
PERFECT_0402 [mm] "https://www.worthingtonassembly.com/perfect-0402-footprint"
  rect 0.6x0.7 smd: 1(-0.5,0) 2(0.5,0)
  silkscreen extent 0,-0.23 0,0.23
R0402_0.40MM_HD [mm] "Resistor 0402 High Density"
  rect 0.35x0.45 smd: 1(-0.45,0) 2(0.45,0)
"SMT_TP - 20" [mil] ".020\" SMT Test pad"
  round 20 smd paste-25: 1(0,0)
SOT23-5 [mm] "SOT23, 5-Leads, Body 3.1x2.6mm (max), Pitch 0.95mm, IPC High Density"
  rect 0.85x0.6 smd: 1(-1.125,0.95) 2(-1.125,0) 3(-1.125,-0.95) 4(1.125,-0.95) 5(1.125,0.95)
  silkscreen extent -1.15,-1.5 0.5,1.92
SOT143B [mm] "SOT143B"
  rect 1.1x0.8 smd: 1(0,0)
  rect 0.6x0.7 smd: 2(1.702,0) 3(1.702,1.9) 4(-0.2,1.9)
  silkscreen extent -0.71,0.43 2.21,1.52
"TC2030 NO LATCH" [mil] "TC2030  NO LATCH"
  round 31 smd paste-40: 1(-50,-25) 2(-50,25) 3(0,-25) 4(0,25) 5(50,-25) 6(50,25)
  round 34 hole 35 unplated: A(-100,0) B(100,40) C(100,-40)
  silkscreen extent -155,-90 125,90
VFBGA176 [mil]
  round 12 smd paste+0 mask+0: A1(-157.48,157.48) A2(-137.8,157.48) A3(-118.11,157.48) A5(-78.74,157.48) A7(-39.37,157.48) A9(0,157.48) A11(39.37,157.48) A13(78.74,157.48) A15(118.11,157.48) A16(137.8,157.48) A17(157.48,157.48) B1(-157.48,137.8) B2(-137.8,137.8) B3(-118.11,137.8) B5(-78.74,137.8) B6(-59.06,137.8) B7(-39.37,137.8) B9(0,137.8) B10(19.69,137.8) B11(39.37,137.8) B13(78.74,137.8) B14(98.43,137.8) B15(118.11,137.8) B16(137.8,137.8) B17(157.48,137.8) C1(-157.48,118.11) C2(-137.8,118.11) C3(-118.11,118.11) C4(-98.43,118.11) C5(-78.74,118.11) C7(-39.37,118.11) C9(0,118.11) C11(39.37,118.11) C13(78.74,118.11) C15(118.11,118.11) C16(137.8,118.11) C17(157.48,118.11) D2(-137.8,98.43) D5(-78.74,98.43) D6(-59.06,98.43) D7(-39.37,98.43) D8(-19.68,98.43) D9(0,98.43) D11(39.37,98.43) D12(59.06,98.43) D13(78.74,98.43) D15(118.11,98.43) E1(-157.48,78.74) E2(-137.8,78.74) E3(-118.11,78.74) E4(-98.43,78.74) E6(-59.06,78.74) E8(-19.68,78.74) E10(19.69,78.74) E12(59.06,78.74) E14(98.43,78.74) E15(118.11,78.74) E16(137.8,78.74) E17(157.48,78.74) F4(-98.43,59.06) F5(-78.74,59.06) F7(-39.37,59.06) F11(39.37,59.06) F13(78.74,59.06) F14(98.43,59.06) F16(137.8,59.06) G1(-157.48,39.37) G2(-137.8,39.37) G3(-118.11,39.37) G4(-98.43,39.37) G6(-59.06,39.37) G12(59.06,39.37) G14(98.43,39.37) G15(118.11,39.37) G16(137.8,39.37) G17(157.48,39.37) H2(-137.8,19.68) H5(-78.74,19.68) H8(-19.68,19.68) H9(0,19.68) H10(19.69,19.68) H13(78.74,19.68) H14(98.43,19.68) J1(-157.48,0) J2(-137.8,0) J3(-118.11,0) J4(-98.43,0) J8(-19.68,0) J10(19.69,0) J14(98.43,0) J15(118.11,0) J16(137.8,0) J17(157.48,0) K4(-98.43,-19.69) K5(-78.74,-19.69) K8(-19.68,-19.69) K9(0,-19.69) K10(19.69,-19.69) K13(78.74,-19.69) K16(137.8,-19.69) L1(-157.48,-39.37) L2(-137.8,-39.37) L3(-118.11,-39.37) L4(-98.43,-39.37) L6(-59.06,-39.37) L12(59.06,-39.37) L14(98.43,-39.37) L15(118.11,-39.37) L16(137.8,-39.37) L17(157.48,-39.37) M2(-137.8,-59.06) M4(-98.43,-59.06) M5(-78.74,-59.06) M7(-39.37,-59.06) M11(39.37,-59.06) M13(78.74,-59.06) M14(98.43,-59.06) N1(-157.48,-78.74) N2(-137.8,-78.74) N3(-118.11,-78.74) N4(-98.43,-78.74) N6(-59.06,-78.74) N8(-19.68,-78.74) N10(19.69,-78.74) N12(59.06,-78.74) N14(98.43,-78.74) N15(118.11,-78.74) N16(137.8,-78.74) N17(157.48,-78.74) P3(-118.11,-98.43) P5(-78.74,-98.43) P6(-59.06,-98.43) P7(-39.37,-98.43) P9(0,-98.43) P10(19.69,-98.43) P11(39.37,-98.43) P12(59.06,-98.43) P13(78.74,-98.43) P16(137.8,-98.43) R1(-157.48,-118.11) R2(-137.8,-118.11) R3(-118.11,-118.11) R5(-78.74,-118.11) R7(-39.37,-118.11) R9(0,-118.11) R11(39.37,-118.11) R13(78.74,-118.11) R14(98.43,-118.11) R15(118.11,-118.11) R16(137.8,-118.11) R17(157.48,-118.11) T1(-157.48,-137.8) T2(-137.8,-137.8) T3(-118.11,-137.8) T4(-98.43,-137.8) T5(-78.74,-137.8) T7(-39.37,-137.8) T8(-19.68,-137.8) T9(0,-137.8) T11(39.37,-137.8) T12(59.06,-137.8) T13(78.74,-137.8) T15(118.11,-137.8) T16(137.8,-137.8) T17(157.48,-137.8) U1(-157.48,-157.48) U2(-137.8,-157.48) U3(-118.11,-157.48) U5(-78.74,-157.48) U7(-39.37,-157.48) U9(0,-157.48) U11(39.37,-157.48) U13(78.74,-157.48) U15(118.11,-157.48) U16(137.8,-157.48) U17(157.48,-157.48)
  silkscreen extent -192,-177 177,189
XTAL_3215 [mm] "XTAL SMD 3.2 x 1.5 mm"
  rect 1x1.8 smd: 1(-1.25,0) 2(1.25,0)
  silkscreen extent -0.6,-0.75 0.6,0.75

## Part data
C1 C5 C18: library part GCM188R70J225KE22D, "CAP CER 2.2UF 6.3V X7R 0603"
C2 C42: library part GCJ188C70J475KE02D, "CAP CER 4.7UF 6.3V X7S 0603"
C3: library part GRT155R61E474KE01D, "CAP CER 0.47UF 25V X5R 0402"
C4 C8 C10: library part GCM155C71A105KE38D, "CAP CER 1UF 10V X7S 0402"
C6 C12 C13 C14 C15 C16 C17 C20 C21 C22 C23 C24 C25 C26 C27 C28 C29 C30 C31 C32 C33 C34 C35 C36 C37 C38 C39 C40 C41: library part CC0201KRX5R5BB104, "Cap Ceramic 0.1uF 6.3VDC X5R 10% SMD 0201 Paper T/R"
C7 C9: library part GRT188R61A106ME13D, "CAP CER 10UF 10V X5R 0603"
C11 C19: library part CGA2B2C0G1H180J050BA, "CAP CER 18PF 50V C0G 0402"
C43: library part CGA2B1X7R1C104K050BC, "CAP CER 0.1UF 16V X7R 0402"
C44 C45: library part GCQ1555C1H9R5BB01D, "CAP CER 9.5PF 50V C0G/NP0 0402"
D1 D2: "DIODE SCHOTTKY 30V 1A SOD323"
D3: library part APT1608CGCK
D4: library part APT1608SURCK
F1 F2 F3 F4 F5 F6 F7 F8: library part Fiducial
J1: library part TC2030-CTL-NL, "Tag Connect Pads - No latching Clips - ARM"
J2: library part CORTEX-DEBUG, "SAMTEC - FTSH-105-01-F-DV - .050 X .050"
L2 L3: library part NRH3012T2R2MN, "Inductor 2.2µH 1.5A"
R1: library part ERJ-2RKF1002X, "RES 10K OHM 1/10W 1% 0402 SMD"
R2 R5: library part ERJ-2RKF2002X, "RES 20K OHM 1/10W 1% 0402 SMD"
R3 R4: library part ERJ-2RKF2201X, "RES 2.2K OHM 1/10W 1% 0402 SMD"
R6 R7 R10 R11 R21 R22: library part ERJ-2GE0R00X, "RES 0.0 OHM 1/10W JUMP 0402 SMD"
R8 R9 R12 R13 R14 R15 R17 R18: library part ERJ-2RKF1003X, "RES 100K OHM 1/10W 1% 0402 SMD"
R16 R19 R20: library part ERJ-2RKF1001X, "RES 1K OHM 1/10W 1% 0402 SMD"
U1: "SOC i.MX ARM Cortex M33 176-Pin VFBGA Tray"
U2: "Power Management IC for Low-Power Microcontroller Applications 24-Pin HVQFN"
U3: "IC BUFF NON-INVERT 2.7 V SOT23-5"
U4: "TVS DIODE 5.5VWM SOT143B"
U6: "3.3v Double-Data-Rate Octal SPI Xccela PSRAM"
X1: library part NX3215SA-32.768K-STD-MUA-9, "CRYSTAL 32.768KHZ 9PF SMD"
X2: library part ABM3-24.000MHZ-B2-T, "CRYSTAL 24.000MHZ 18PF SMD"

## Free pads (board coordinates)
  round 170 hole 70: 2(100,100) 2(100,1350) 2(1350,100) 2(1350,1350)

## Via types
v1: diameter 18, hole 8, Top Layer to Bottom Layer, tented both sides, 124 vias
v2: diameter 12, hole 6, Top Layer to Bottom Layer, tented both sides, 83 vias

## Nets (pads, with @x,y where several pads share a name; then routed paths per layer and width w, separated by ;. In a path a pad name is that pad's centre, name@x,y a point inside that pad or via, vN(x,y) a via of type N, cw(c..) or ccw(c..) an arc to the next point about the centre after c; other vN are vias at no path point)
+1v8: C36.2 C37.2 C38.2 C39.2 C40.2 C41.2 R10.2 R21.1 U1.A13 U1.B11 U1.C4 U1.C16 U1.C17 U1.E4 U1.E15 U1.F13 U1.G14 U1.L4 U1.R15 | length 2010.4
  Top Layer w10: v2(361.57,818.74) v2(361.57,858.11) ; v2(538.74,799.06) 538.74,786.18 545.17,779.75 558.04,779.75 U1.G14@558.43,779.37 ; U1.R15@578.11,623.61 v2(578.11,641.57) ; v2(597.8,858.11) v2(617.48,858.11) ; v1(666.32,1176.18) 666.5,1176.35 682.44,1176.35 R10.2@682.62,1176.53 v1(682.62,1157.11)
  PWR w10: v2(361.57,700.63) 361.19,701.01 361.19,713.81 355,720 331.36,720 303,691.64 303,596 318,581 534.16,581 577.73,624.57 577.73,641.19 v2(578.11,641.57) 578.11,674.11 587,683 618.14,683 624,688.86 624,772.85 v2(578.11,818.74) 578.11,838.43 579.09,839.41 ; v2(361.57,858.11) v2(361.57,818.74) 361.57,792.43 375,779 518.69,779 v2(538.74,799.06) 539,799.31 539,837.18 536.77,839.41 ; v2(538.74,897.48) 504.86,897.48 499.75,892.38 499.75,878.18 v2(499.37,877.8) 499.75,877.41 499.75,862.65 522.99,839.41 536.77,839.41 ; v2(617.48,858.11) v2(597.8,858.11) 597.8,845.27 591.94,839.41 579.09,839.41 ; 536.77,839.41 579.09,839.41
  Bottom Layer w10: v1(263.36,905.98) 348.03,905.98 353.89,900.12 353.89,879.92 361.19,872.62 361.19,858.49 v2(361.57,858.11) 361.57,857.57 359.49,855.48 359.49,840.08 C39.2@359.41,840 ; v2@361.03,700.63 v2(361.57,700.63) 361.92,700.97 361.92,721.08 C40.2@362,721.16 ; v2@499.47,877.89 v2(499.37,877.8) 499.37,899.1 499.45,899.18 C36.2@499.57,899.18 ; C41.2@538,819 538,800.34 538.74,799.6 v2(538.74,799.06) ; C37.2@538,912.06 551.38,912.06 597.8,958.47 597.8,1127.8 613.55,1143.55 633.34,1143.55 666.32,1176.53 666.32,1174.97 682.62,1158.67 v1(682.62,1157.11) ; C37.2@538.3,912.06 538.38,911.98 538.38,898.35 v2@539,897.74
+1v8_AO: C10.2 R2.2 R5.2 U1.C13 U1.D13 U2.12 U3.5 | length 1146.1
  Top Layer w5: U1.D13@538.74,838.43 v2(538.74,858.11)
  Top Layer w10: R2.2@916.38,727.01 916.38,684.86 940.62,660.62 U3.5@974.14,660.62 979.35,660.62 1025,706.27 v1(1025,736.37) 1025,743.78 1042.25,761.02 1071.82,761.02 1077.68,766.88 R5.2@1077.68,785.41 1077.68,809 1033.19,853.5 1017.09,853.5 U2.12@1013.03,857.56
  Bottom Layer w7: C10.2@460,882.72 460,869 470.89,858.11 v2(538.74,858.11) 555.8,875.17 555.8,885.12 593.94,923.26 668.38,923.26 751.64,840 946.41,840 968.81,817.59 968.81,772.25 1004.69,736.37 v1(1025,736.37)
+3v3: C12.2 C13.2 C14.2 C15.2 C16.2 C17.2 C18.2 C20.2 C21.2 C22.2 C23.2 C24.2 C25.2 C42.1 C43.1 J1.1 J2.1 R3.2 R4.2 R8.2 R9.2 R12.2 R13.2 R14.2 R22.2 T50.1 U1.E6 U1.E8 U1.E10 U1.F5 U1.H5 U1.H13 U1.H14 U1.K5 U1.K13 U1.L14 U1.M5 U1.N6 U1.N8 U1.N10 U1.N12 U1.N16 U1.P11 U1.P12 U6.B4 U6.D1 U6.E4 | length 1450.7
  Top Layer w6: R9.2@630.28,292.72 647.72,292.72 v1(650,295) ; v1(805.91,874.45) 805.91,862.12 819.46,848.57 819.46,846.61 823.35,842.72 R3.2@825.31,842.72 ; v1(857,737) 859.3,734.7 864.09,734.7 871.78,727.01 R4.2@873.74,727.01
  Top Layer w8: v1(239.5,288.75) 239.72,288.96 R14.2@239.72,290 ; v1(239.5,355.63) 239.72,355.85 R13.2@239.72,356.48 ; C43.1@325,325.15 344.47,325.15 355.33,336 408.87,336 v1(428.5,355.63) ; U6.D1@546.61,434.37 548.39,434.37 554.32,440.3 v1(583.93,440.3) C42.1@613.54,440.3 ; J2.1@986.67,285.42 987.33,286.09 v1(989.41,286.09)
  Top Layer w10: v2(381,681) U1.M5@381.26,680.94 U1.M5@381.26,680.94 U1.N6@400.94,661.26 v2(440.32,661.26) U1.N10@479.69,661.26 480.07,660.88 490.12,660.88 498.99,652.01 498.99,641.96 v2(499.37,641.57) ; v2(381.26,720.31) 381.64,720.7 395.7,720.7 409,734 409,751.63 400.94,759.68 v2(381.26,759.68) v2(381.26,799.06) v2(381.26,819.12) 400.56,819.12 U1.E6@400.94,818.74 U1.E8@440.32,818.74 U1.E10@479.69,818.74 ; v2(519.06,641.57) U1.N12@519.06,661.26 ; U1.K13@534.51,724 530.06,724 519.06,735 519.06,750.06 528.3,759.3 538.36,759.3 v2(538.74,759.68) U1.H14@558.43,759.68 ; v2(538.74,720.31) U1.L14@558.43,700.63 ; R22.2@1133.72,895 1133.72,857.59 1154.99,836.33 v2(1155.45,836.33) ; v2@1159.78,836.33 1179.69,836.33 v2(1181,835.02)
  PWR w50: 1328.89,826.11 1330,825 T50.1@1400,825
  Bottom Layer w5: C15.2@492.48,680.76 518.75,680.76 538.74,700.74 v2(538.74,720.31)
  Bottom Layer w10: C16.2@361,790 361,791.81 361.08,791.89 373.55,791.89 380.72,799.06 v2(381.26,799.06) ; v2(381,681) C20.2@381,701 381.08,701.08 381.08,720.13 v2(381.26,720.31) ; v2(381.26,759.68) 381.64,760.07 391.88,760.07 401,769.19 C21.2@401,771 401,772.81 C21.2@400.92,772.89 ; v2(381.26,819.12) 381.64,819.51 400.41,819.51 400.49,819.58 C17.2@400.49,820.12 ; v2(381.26,799.06) C13.2@396.97,799.03 ; C24.2@425,662 425,661.71 425.08,661.63 439.94,661.63 v2(440.32,661.26) ; C15.2@492.48,680.76 492.48,660.68 498.99,654.17 498.99,641.96 v2(499.37,641.57) ; C12.2@500,618 499.37,618.63 v2(499.37,641.57) ; C22.2@519,772 519,770.19 529.12,760.07 538.36,760.07 v2(538.74,759.68) 539.12,759.3 551.39,759.3 567.88,742.81 C25.2@567.88,741 ; v2(538.74,720.31) 539.28,720.31 542.71,716.89 555.8,716.89 555.88,716.81 C23.2@555.88,715 ; C14.2@582.24,681.93 582.24,680.12 597.41,664.94 597.41,661.64 v2(597.8,661.26) 524.91,661.26 519.44,655.78 519.44,641.96 v2(519.06,641.57) v2(499.37,641.57)
  other v1: 826,424.15 239.72,431.39 428.5,473.74
  other v2: 1179.38,696.05
+5vUSB: D2.1 T55.1 U1.R16 U4.4 | length 1215.6
  Top Layer w5: v1(811,614.43) 811.38,614.04 827.5,614.04 830,611.54 960.17,611.54 979.06,630.44 U4.4@1134.5,630.44 1150.44,630.44 v1(1151,631)
  Top Layer w20: D2.1@1194.12,1123.21 1251.79,1123.21 T55.1@1300,1075
  PWR w5: v1(1151,631) 1233.52,713.52 1233.52,1008.52 T55.1@1300,1075
  Bottom Layer w5: v2(597.8,621.89) 597.97,621.89 625.76,594.1 793.56,594.1 811,611.54 v1(811,614.43)